# Altium PCB pow_hw_1_V00.03.PcbDoc
Units mil, origin at the board's own origin, x right, y up, seen from the top; angles counter-clockwise.
Board outline 625.03 x 2025.03 mil, 2 copper layers (Top Layer, Bottom Layer); 31 components, 13 nets, 86 pads, 45 vias.
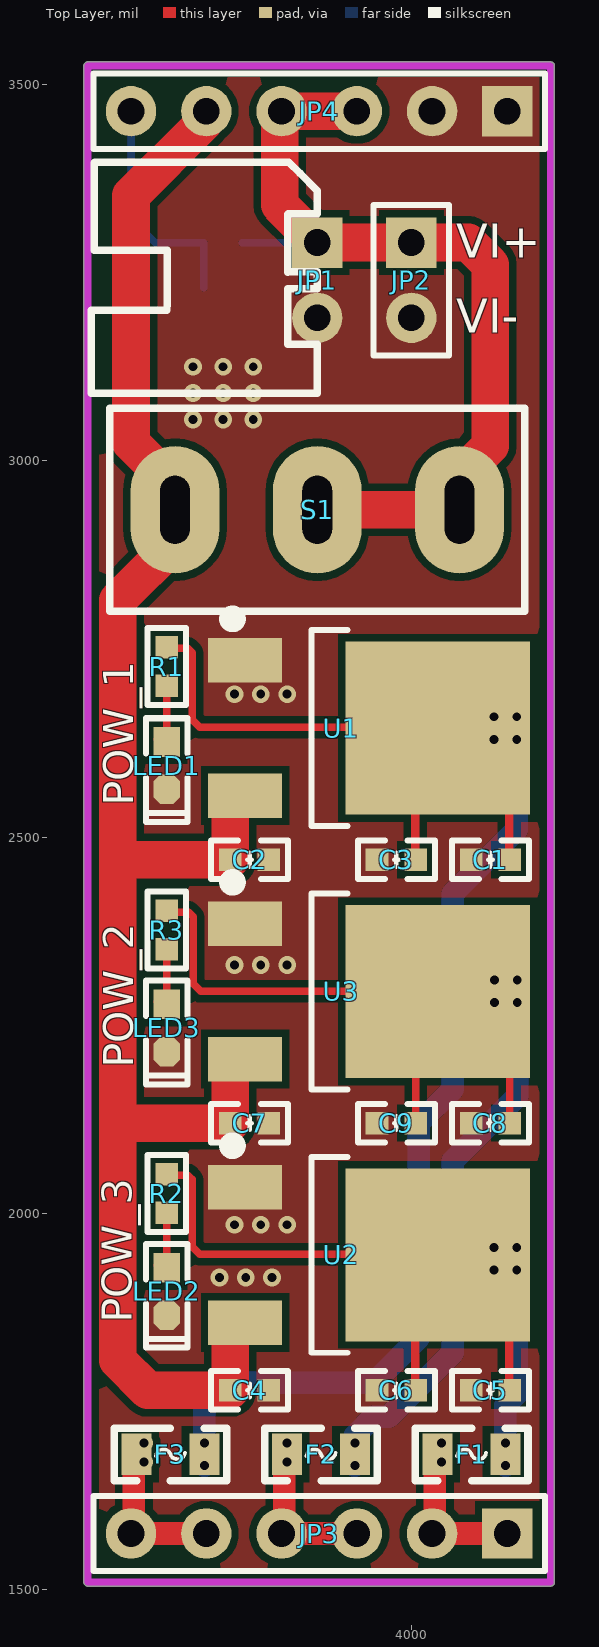
[diagram p0: Top Layer view]
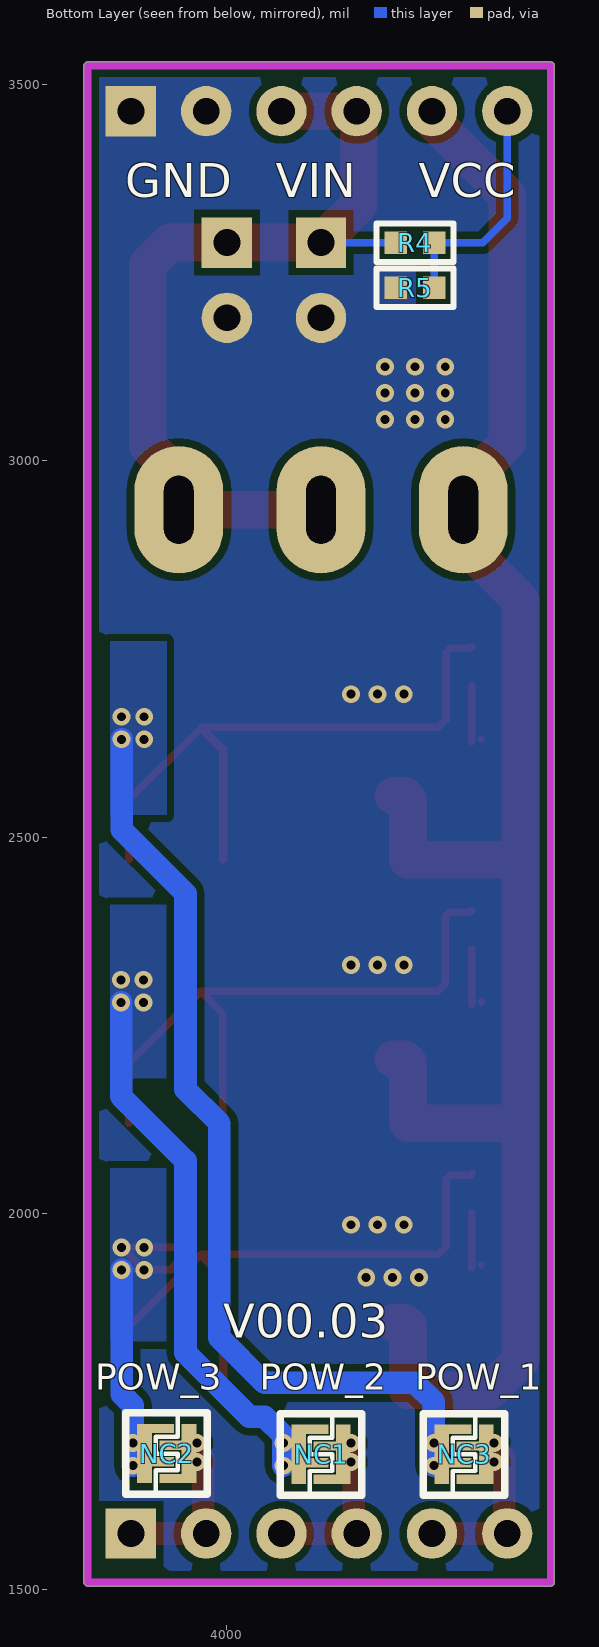
[diagram p1: Bottom Layer view, seen from below]

## Layer stack, top to bottom
Top Solder: solder mask 0.4, Solder Resist, Dk 3.5
Top Layer: signal copper 1.4
Dielectric 1: dielectric 12.6, FR-4, Dk 4.8
Bottom Layer: signal copper 1.4
Bottom Solder: solder mask 0.4, Solder Resist, Dk 3.5

## Board outline
3564.99,1510 ccw(c3570,1510) 3570,1504.98 4185,1504.98 ccw(c4185,1510) 4190.02,1510 4190.02,3525 ccw(c4185,3525) 4185,3530.01 3570,3530.01 ccw(c3570,3525) 3564.99,3525

## Design rules (kind name [scope] priority, off if disabled: settings)
Clearance [All] p1: gap=10 ignorepadtopadclearanceinfootprint=TRUE
PlaneConnect [All] p1: planeconnectstyle=Direct reliefexpansion=20 reliefentries=4 reliefconductorwidth=10 reliefairgap=10
PolygonConnect [All] p1: connectstyle=Direct reliefconductorwidth=10 reliefentries=4 polygonreliefangle="90 Angle" airgapwidth=10
RoutingVias [All] p1: holewidth=28 width=50 viastyle="Through Hole" minholewidth=28 minwidth=50 maxholewidth=28 maxwidth=50
SolderMaskExpansion [All] p1: expansion=4 istentingtop=FALSE
SupplyNets "Schematic Supply Nets_8" [InNet('POW_2')] p1: voltage=0.000
SupplyNets "Schematic Supply Nets_7" [InNet('POW_3')] p2: voltage=0.000
SupplyNets "Schematic Supply Nets_6" [InNet('POW_1')] p3: voltage=0.000
SupplyNets "Schematic Supply Nets_5" [InNet('GND')] p4: voltage=0.000
SupplyNets "Schematic Supply Nets_2" [InNet('VCC')] p5: voltage=0.000
SupplyNets "Schematic Supply Nets_1" [InNet('VIN')] p6: voltage=0.000
Width [All] p1: maxlimit=100 minlimit=10 preferedwidth=10 minimp=50.000000 maximp=50.000000 favimp=50.000000
29 further rules are at their usual default settings.

## Components (designator, comment, footprint, x,y, rotation, side; value= is the part's Value field where it differs from the comment)
C1 "100nF" "C 0603_L" 4105,2470 r180 top
C2 "10uF" "C 0603_L" 3785,2470 r0 top
C3 "10uF" "C 0603_L" 3980,2470 r180 top
C4 "10uF" "C 0603_L" 3785,1765 r0 top
C5 "100nF" "C 0603_L" 4105,1765 r180 top
C6 "10uF" "C 0603_L" 3980,1765 r180 top
C7 "10uF" "C 0603_L" 3785,2120 r0 top
C8 "100nF" "C 0603_L" 4105,2120 r180 top
C9 "10uF" "C 0603_L" 3980,2120 r180 top
F1 "MSMD200-6V 0.5A" "FU 0805" 4080,1680 r180 top
F2 "MSMD200-6V 0.5A" "FU 0805" 3880,1680 r180 top
F3 "MSMD200-6V 0.5A" "FU 0805" 3680,1680 r180 top
JP1 "HDR-1X2" XH2.54-WI-2P 3875,3240 r270 top
JP2 "HDR-1X2" HDR2.54-LI-2P 4000,3240 r270 top
JP3 "HDR-1X6" HDR2.54-LI-6P 3877.56,1574.8 r180 top
JP4 "HDR-1X6" HDR2.54-LI-6P 3877.56,3464.57 r180 top
LED1 "Colour" "LED 0603R" 3675,2595 r270 top
LED2 "Colour" "LED 0603R" 3675,1896.5 r270 top
LED3 "Colour" "LED 0603R" 3675,2246.5 r270 top
NC1 "Node" NODE-2 3875,1680 r180 bottom
NC2 "Node" NODE-2 4080.08,1681.07 r180 bottom
NC3 "Node" NODE-2 3685,1680 r180 bottom
R1 "2K" "R 0603_L" 3675,2726.5 r270 top
R2 "2K" "R 0603_L" 3675,2026.5 r270 top
R3 "2K" "R 0603_L" 3675,2376.5 r270 top
R4 "2K" "R 0603_L" 3750,3290 r180 bottom
R5 "2K" "R 0603_L" 3750,3230 r0 bottom
S1 "SS-12F23" SS-12D10 3875,2935 r180 top
U1 "AMS1086CD-5.0" TO252 3887.36,2645 r270 top
U2 "AMS1086CD-5.0" TO252 3887.36,1945 r270 top
U3 "AMS1086CD-3.3" TO252 3887.36,2295 r270 top

## Footprints (in the part's own frame and the unit in brackets; to place one, negate y for a bottom-side part, rotate by r counter-clockwise, add the part's x,y. Pads: shape width x height; smd on the part's side, far side on the other; paste and mask are expansions set on the pad)
"C 0603_L" [mil] "无极性贴片电容"
  rect 30x30 smd: 1(-25.59,0) 2(25.59,0)
  silkscreen extent -51,-26 51,26, body extent -31,-16 31,16, height 32
"FU 0805" [mil] "贴片保险丝"
  rect 40x55 smd: 1(-45,0) 2(45,0)
  silkscreen extent -75,-35 75,35, body extent -39,-24 39,24, height 20
HDR2.54-LI-2P [mm] "排针，2脚"
  rect 1.7x1.7 hole 0.9: 1(-1.27,0)
  round 1.7 hole 0.9: 2(1.27,0)
  silkscreen extent -2.54,-1.27 2.54,1.27, body extent -2.54,-1.27 2.54,1.27, height 8.5
HDR2.54-LI-6P [mm] "排针，6脚"
  rect 1.7x1.7 hole 0.9: 1(-6.35,0)
  round 1.7 hole 0.9: 2(-3.81,0) 3(-1.27,0) 4(1.27,0) 5(3.81,0) 6(6.35,0)
  silkscreen extent -7.62,-1.27 7.62,1.27, body extent -7.62,-1.27 7.62,1.27, height 8.5
"LED 0603R" [mm] "红色0603LED"
  rect 1x0.9 smd: 1(-0.8,0)
  oct 1x0.9 smd: 2(0.8,0)
  silkscreen extent -1.6,-0.7 1.9,0.7, body extent -0.8,-0.4 0.8,0.4, height 0.47
NODE-2 [mm] "2mm大电流节点"
  rect 0.5x2 smd: 1(-0.75,0) 2(0.75,0)
  rect 0.75x0.313 smd: 1(-0.125,-0.281) 1(-0.125,0.844) 2(0.125,-0.844) 2(0.125,0.281)
  silkscreen extent -1.38,-1.38 1.38,1.38
"R 0603_L" [mil] "1/10W贴片电阻"
  rect 30x30 smd: 1(-25.59,0) 2(25.59,0)
  silkscreen extent -51,-26 51,26, body extent -31,-16 32,16, height 16
SS-12D10 [mm] "脚距4.8mm"
  oval 3x4.3 hole 2.3 slot 1 at 0 deg: 1(-4.8,0) 2(0,0) 3(4.8,0)
  silkscreen extent -7,-3.43 7,3.43, body extent -6.71,-3.3 6.71,3.3, height 11.8
TO252 [mm] "252晶体管"
  rect 1.5x2.5 smd: 1(-2.285,-2.75) 3(2.285,-2.75)
  rect 5.842x6.223 smd: 2(0,3.75)
  silkscreen extent -3.88,-3.37 3.3,0.7, body extent -3.25,-3.05 3.25,6.37, height 2.3
XH2.54-WI-2P [mm] "接插件，2P"
  rect 1.7x1.7 hole 0.9: 1(-1.27,0)
  round 1.7 hole 0.9: 2(1.27,0)
  silkscreen extent -3.99,-7.62 3.81,0, body extent -3.77,-7.35 3.77,0.35, height 5.73

## Part data
C1 C2 C3 C4 C5 C6 C7 C8 C9: library part C, "无极性贴片电容", BOM名称=无极性贴片电容, 学习资源=www.ooocke.com, 版权归属=源创客
F1 F2 F3: library part FU, "贴片保险丝", BOM名称=贴片保险丝, 学习资源=www.ooocke.com, 版权归属=源创客
JP1 JP2: library part "Header 2", "2P接插件", BOM名称=2P接插件, 学习资源=www.ooocke.com, 版权归属=源创客
JP3 JP4: library part "Header 6", "6P接插件", BOM名称=6P接插件, 学习资源=www.ooocke.com, 版权归属=源创客
LED1 LED2 LED3: library part LED-SMD, "贴片LED", BOM名称=贴片LED, 学习资源=www.ooocke.com, 版权归属=源创客
NC1 NC2 NC3: library part NODE, "大电流节点"
R1 R2 R3 R4 R5: library part 电阻, "贴片电阻1%精度"
S1: library part SSW-1P, "1路拨动开关", BOM名称=波动开关, 学习资源=www.ooocke.com, 版权归属=源创客
U3: library part AMS1086CD-5.0

## Via types
v1: diameter 23.62, hole 11.81, Top Layer to Bottom Layer, 45 vias

## Nets (pads, with @x,y where several pads share a name; then routed paths per layer and width w, separated by ;. In a path a pad name is that pad's centre, name@x,y a point inside that pad or via, vN(x,y) a via of type N, cw(c..) or ccw(c..) an arc to the next point about the centre after c; other vN are vias at no path point)
ADC_VIN: JP4.6 R4.2 R5.1 | length 312.4
  Bottom Layer w10: JP4.6 3627.56,3322.44 3660,3290 R4.2 R5.1
GND: C1.2 C2.2 C3.2 C4.2 C5.2 C6.2 C7.2 C8.2 C9.2 JP1.2 JP2.2 JP4.1 JP4.2 LED1.2 LED2.2 LED3.2 R5.2 U1.1 U2.1 U3.1
  other v1: 3745,1915 3780,1915 3815,1915 3765,1985 3800,1985 3835,1985 3765,2330 3800,2330 3835,2330 3765,2690 3800,2690 3835,2690 3710,3055 3750,3055 3790,3055 3710,3090 3750,3090 3790,3090 3710,3125 3750,3125 3790,3125
NetF1_2: F1.2 JP3.1 JP3.2 NC2.2 | length 225.9
  Top Layer w30: F1.2 4031.28,1676.28 4031.28,1578.52 JP3.2 JP3.1
  Bottom Layer w30: JP3.1 JP3.1@4140,1587.24
  other v1: 4040,1670 4040,1695
NetF2_2: F2.2 JP3.3 JP3.4 NC1.2 | length 208.3
  Top Layer w30: F2.2 3831.28,1676.28 3831.28,1578.52 JP3.4 JP3.3
  other v1: 3835,1670 3835,1695
NetF3_2: F3.2 JP3.5 JP3.6 NC3.2 | length 218.3
  Top Layer w30: F3.2 3631.28,1676.28 3631.28,1578.52 JP3.6 JP3.5
  Bottom Layer w30: JP3.5 JP3.5@3727.56,1584.8
  other v1: 3645,1670 3645,1695
NetLED1_1: LED1.1 R1.2 | length 74.4
  Top Layer w10: LED1.1 R1.2
NetLED2_1: LED2.1 R2.2 | length 72.9
  Top Layer w10: LED2.1 R2.2
NetLED3_1: LED3.1 R3.2 | length 72.9
  Top Layer w10: LED3.1 R3.2
POW_1: C1.1 C3.1 F3.1 NC3.1 R1.1 U1.2 | length 2514.2
  Top Layer w10: R1.1@3673.95,2753.13 3676.04,2751.04 3703.1,2751.04 3708.95,2745.19 3708.95,2656.04 3718.95,2646.04 U1.2@4033.95,2646.04 ; C3.1@4004.55,2471.05 4004.55,2616.64 U1.2@4033.95,2646.04 ; C3.1 4005.59,2615.59 U1.2 ; C1.1@4129.55,2471.05 4129.55,2550.45 U1.2 ; C1.1 4130.59,2549.41 U1.2 ; U1.2@4033.95,2646.04 U1.2
  Bottom Layer w30: v1(3725,1665) 3725,1680 v1(3725,1695) 3725,1750 3750,1775 3950,1775 4010,1835 4010,2120 4055,2165 4055,2425 4140,2510 v1(4140,2630)
  other v1: 4110,2630 4110,2660 4140,2660
POW_2: C8.1 C9.1 F2.1 NC1.1 R3.1 U3.2 | length 1574.9
  Top Layer w10: R3.1 3677.09,2400 3704.14,2400 3710,2394.14 3710,2305 3720,2295 U3.2 ; C9.1 4005.59,2265.59 U3.2 ; C8.1 4130.59,2199.41 U3.2
  Bottom Layer w30: v1(3925,1665) 3925,1705 3950,1730 3970,1730 4055,1815 4055,2070 4140.68,2155.68 v1(4140.68,2280.48)
  other v1: 3925,1695 4110.68,2280.48 4110.68,2310.48 4140.68,2310.48
POW_3: C5.1 C6.1 F1.1 NC2.1 R2.1 U2.2 | length 1772.9
  Top Layer w10: R2.1@3673.95,2053.13 3676.04,2051.04 3703.1,2051.04 3708.95,2045.19 3708.95,1956.04 3718.95,1946.04 U2.2@4033.95,1946.04 ; C6.1@4004.55,1771.05 4004.55,1916.64 U2.2@4033.95,1946.04 ; C6.1 4005.59,1915.59 U2.2 ; C5.1@4129.55,1771.05 4129.55,1850.45 U2.2@4055,1925 ; C5.1 4130.59,1849.41 U2.2@4055,1925 ; v1(4140,1925) v1(4110,1925) ; U2.2@4033.95,1946.04 U2.2 ; U2.2 U2.2@4055,1925 ; U2.2@4055,1925 U2.2@4075,1925 ; U2.2@4075,1925 4045,1955 v1(4110,1955) v1(4140,1955) v1(4110,1925) ; U2.2@4075,1925 v1(4110,1925)
  Bottom Layer w30: v1(4125,1665) 4125,1745 4140,1760 v1(4140,1925)
  other v1: 4125,1695
VCC: C2.1 C4.1 C7.1 JP4.5 S1.3 U1.3 U2.3 U3.3 | length 2534.8
  Top Layer w50: JP4.5 3724.32,3461.33 3724.32,3449.32 3627.56,3352.56 3627.56,3023.94 3686.02,2965.47 3686.02,2890.98 3610,2814.96 3610,2470 ; U2.3 3763.93,1855.04 3759.41,1850.51 C4.1 3650.01,1764.99 3610,1805 3610,2125 ; U3.3 3763.93,2205.04 3759.41,2200.51 C7.1 3615,2120 3610,2125 ; U1.3 3763.93,2555.04 3759.41,2550.51 C2.1 3610.01,2469.99 ; 3610,2125 3610,2470
VIN: JP1.1 JP2.1 JP4.3 JP4.4 R4.1 S1.1 S1.2 | length 1169.6
  Top Layer w50: S1.2 S1.1 4063.98,2979.02 4105,3020.04 4105,3260.71 4075.71,3290 JP2.1 JP1.1 3825,3340 3825,3462 JP4.4 JP4.3
  Bottom Layer w10: R4.1 JP1.1

## Polygon pours and split planes (outlines as drawn)
GND on Bottom Layer "GND_L02_P003" (solid, pour order 3): 3564.99,1515 ccw(c3570,1515) 3570,1509.98 4185,1509.98 ccw(c4185,1515) 4190.02,1515 4190.02,3525 ccw(c4185,3525) 4185,3530.01 3570,3530.01 ccw(c3570,3525) 3564.99,3525
POW_3 on Bottom Layer "POW_3_L02_P002" (solid, pour order 2): 4080,2060 4155,2060 4155,1830 4080,1830
POW_2 on Bottom Layer "POW_2_L02_P001" (solid, pour order 1): 4080,2410 4155,2410 4155,2180 4080,2180
POW_1 on Bottom Layer "POW_1_L02_P000" (solid, pour order 0): 4080,2760 4155,2760 4155,2530 4080,2530
GND on Top Layer "GND_L01_P004" (solid, pour order 4): 3564.99,1515 ccw(c3570,1515) 3570,1509.98 4185,1509.98 ccw(c4185,1515) 4190.02,1515 4190.02,3525 ccw(c4185,3525) 4185,3530.01 3570,3530.01 ccw(c3570,3525) 3564.99,3525

## Keep-outs
Keep-Out Layer:
  lines w10: 3570,1525 3570,3525 4185,3525 4185,1510 3570,1510 3570,1535

## Silkscreen, mask and mechanical layers (free items; w line width, h text height)
Top Overlay:
  text "VI+" at 4060,3270 h45
  text "VI-" at 4060,3170 h45
  text "POW_1" at 3630.59,2542.01 h40 r90
  text "POW_2" at 3630.59,2193.5 h40 r90
  text "POW_3" at 3628.34,1855 h40 r90
Bottom Overlay:
  text "VCC" at 3745,3350 h45
  text "VIN" at 3935,3350 h45
  text "GND" at 4135,3350 h45
  text "V00.03" at 4005,1835 h45
  text "POW_1" at 3750,1765.83 h35
  text "POW_2" at 3956.67,1765.83 h35
  text "POW_3" at 4175,1765.83 h35